# Allegro board MY_TEST731_2.brd
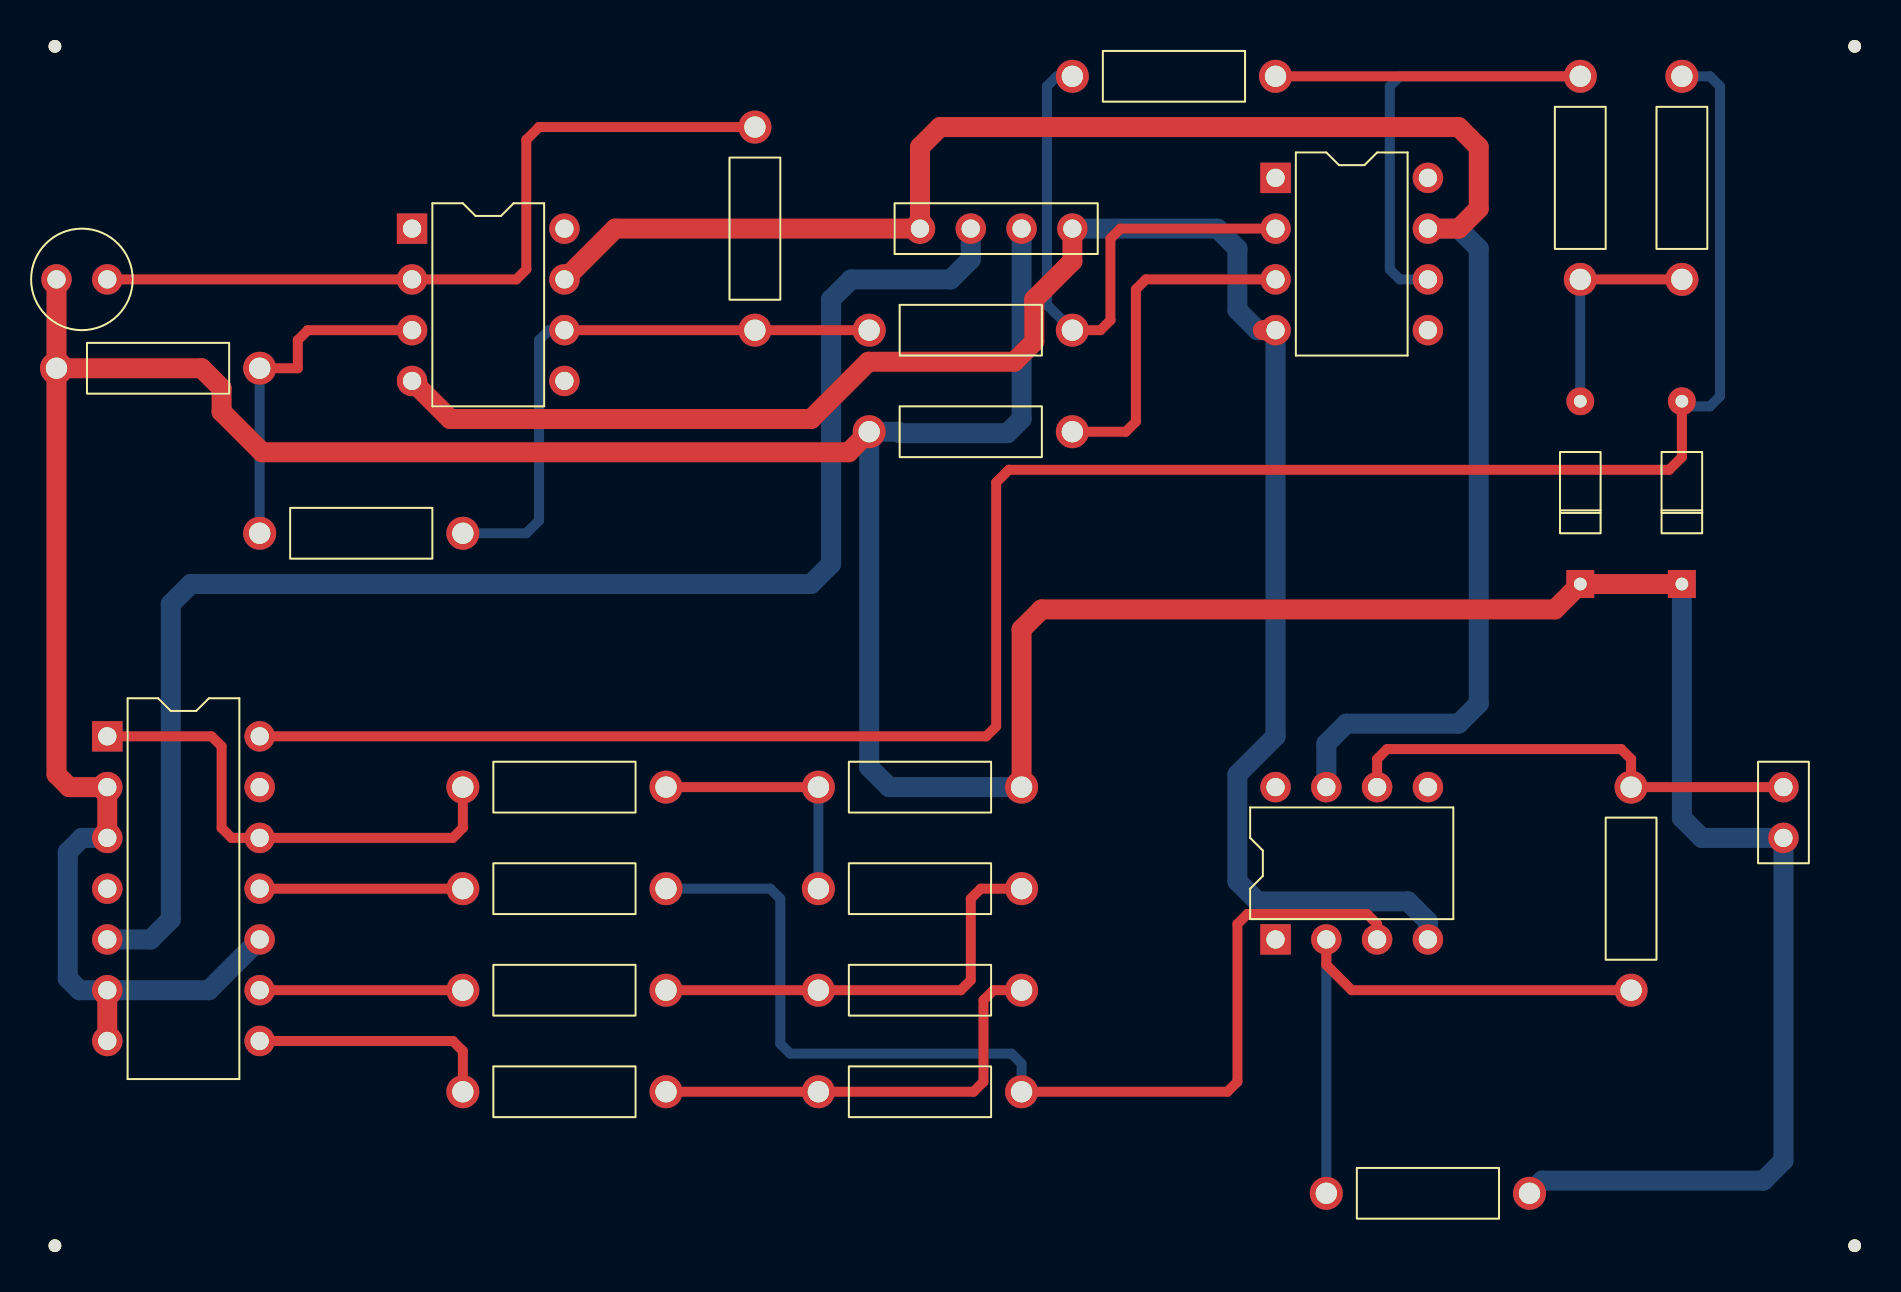
[diagram p0: board, top side]
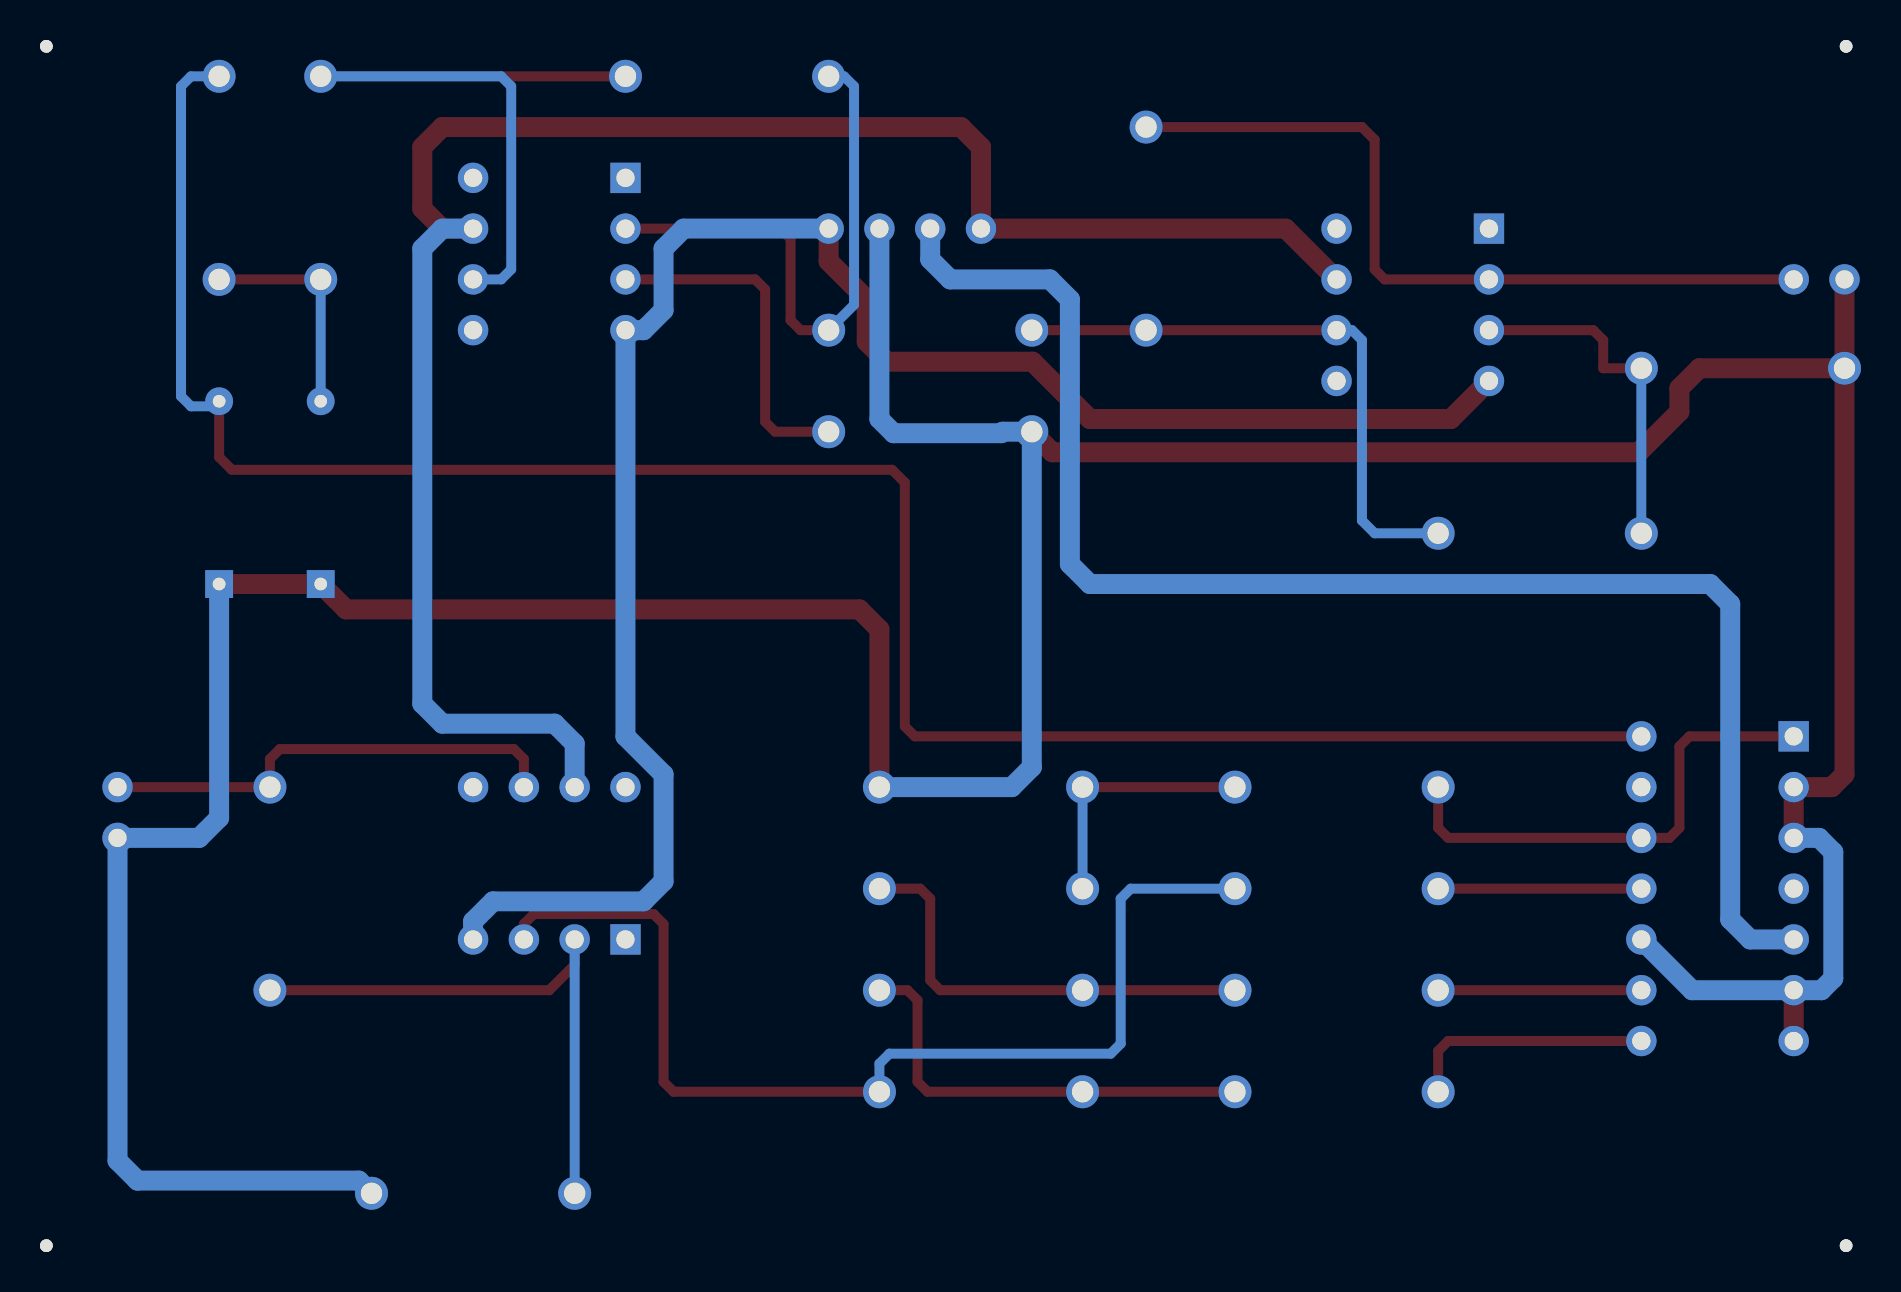
[diagram p1: board, bottom side, seen from below]

No outline. copper layers: TOP, BOTTOM. Coordinates in mm from the lowest, leftmost part position.

## Design rules (mm)
net group POWER: nets +5V +12V -12V GND
nets with their own width: min track width 0.5; nets CLK N00258 N00289 N00307 N00342 N00346 N00366 N00374 N01707 N01734 N01746 N01758 N01769 N01773 N01777 N01923 OUT SIG

## Placement (name value [footprint] x y rotation side)
C1  0.1uF  [CAP196]  0.08 48.34 270 top
D1  1N4148  [DO35]  76.28 33.1 0 top
D2  RD 5.8A  [DO35]  81.36 33.1 0 top
J1  CON2  [JUMPER2]  86.44 22.94 270 top
J2  CON4  [JUMPER4]  43.26 50.88 0 top
NOREF  -  [unnamed]  90 60 0 top
NOREF#2  -  [unnamed]  90 0 0 top
NOREF#3  -  [unnamed]  0 60 0 top
NOREF#4  -  [unnamed]  0 0 0 top
R1  10K  [RES400]  35.01 55.96 180 top
R2  5.1K  [RES400]  50.88 58.5 270 top
R3  10K  [RES400]  40.72 45.8 270 top
R4  1K  [RES400]  76.28 48.34 0 top
R5  1K  [RES400]  81.36 58.5 180 top
R6  10K  [RES400]  40.72 40.72 270 top
R7  6.8K  [RES400]  10.24 35.64 270 top
R8  1K  [RES400]  0.08 43.9 270 top
R9  22K  [RES400]  20.4 17.86 270 top
R10  22K  [RES400]  78.82 12.78 0 top
R11  10K  [RES400]  38.18 7.7 270 top
R12  22K  [RES400]  20.4 7.7 270 top
R13  10K  [RES400]  38.18 12.78 270 top
R14  22K  [RES400]  20.4 12.78 270 top
R15  10K  [RES400]  38.18 17.86 270 top
R16  R  [RES400]  73.74 2.62 90 top
R17  22K  [RES400]  20.4 22.94 270 top
R18  10K  [RES400]  48.34 22.94 90 top
U1  LM741  [DIP8_3]  17.86 50.88 0 top
U2  LM741  [DIP8_3]  61.04 53.42 0 top
U3  74LS90  [DIP14_3]  2.62 25.48 0 top
U4  LM741  [DIP8_3]  61.04 15.32 90 top

## Library data of the parts
C1 = C: Tolerance: ***; User Part Number: ***
D1 = D1N4148
D2 = D02BZ2_2
J1 = CON2: User Part Number: ***
J2 = CON4: User Part Number: ***
R1-R18 = R: Tolerance: ***; User Part Number: ***
U1 U2 U4 = LM741: Tolerance: ***; User Part Number: ***
U3 = 74LS90_1: Tolerance: ***; User Part Number: ***

## Footprints (pads in the part's own frame, mm; a bottom-side part is the same pattern mirrored in y, then rotated)
CAP196
  round 1.524 hole 0.914: 1(0,0) 2(0,2.54)
DIP8_3
  rect 1.524x1.524 hole 0.914: 1(0,0)
  round 1.524 hole 0.914: 2(0,-2.54) 3(0,-5.08) 4(0,-7.62) 5(7.62,-7.62) 6(7.62,-5.08) 7(7.62,-2.54) 8(7.62,0)
DIP14_3
  rect 1.524x1.524 hole 0.914: 1(0,0)
  round 1.524 hole 0.914: 2(0,-2.54) 3(0,-5.08) 4(0,-7.62) 5(0,-10.16) 6(0,-12.7) 7(0,-15.24) 8(7.62,-15.24) 9(7.62,-12.7) 10(7.62,-10.16) 11(7.62,-7.62) 12(7.62,-5.08) 13(7.62,-2.54) 14(7.62,0)
DO35
  rect 1.397x1.397 hole 0.635: 1(0,0)
  round 1.397 hole 0.635: 2(0,9.144)
JUMPER2
  round 1.524 hole 0.914: 1(0,0) 2(2.54,0)
JUMPER4
  round 1.524 hole 0.914: 1(0,0) 2(2.54,0) 3(5.08,0) 4(7.62,0)
RES400
  round 1.651 hole 1.067: 1(0,0) 2(0,10.16)
unnamed
  round 0.635 hole 3.175 unplated: (0,0)

## Nets
+5V: J2.2 U3.5
+12V: J2.1 U1.7 U2.7 U4.7
-12V: J2.4 U1.4(V-) U2.4(V-) U4.4(V-)
GND: C1.1 D1.1 D2.1 J1.2 J2.3 R6.1 R8.1 R16.1 R18.1 U3.2 U3.3 U3.6 U3.7(R92) U3.10
CLK: D2.2 R5.1 U3.14
OUT: J1.1 R10.2 U4.6
SIG: R9.2 R11.2 U4.3
N00258: C1.2 R1.1 U1.2
N00289: R7.1 R8.2 U1.3
N00307: R1.2 R3.1 R7.2 U1.6
N00342: R2.1 R3.2 U2.2
N00346: R6.2 U2.3
N00366: R2.2 R4.2 U2.6
N00374: D1.2 R4.1 R5.2
N01707: R17.1 U3.1 U3.12
N01734: R9.1 U3.11
N01746: R12.1 U3.8
N01758: R14.1 U3.9
N01769: R11.1 R12.2 R13.2
N01773: R13.1 R14.2 R15.2
N01777: R15.1 R17.2 R18.2
N01923: R10.1 R16.2 U4.2

Pads without a net: U1 1 5 8; U2 1 5 8; U3 4 13; U4 1 5 8

## Routing (per net, layer and track width the routed paths; a pad name or vN(x,y) marks a point on that pad's centre or on a via; arc(x,y) is an arc through that point)
+5V: length 75.8
  BOTTOM w1: U3.5 4.79,15.32 5.79,16.32 5.79,32.1 6.79,33.1 37.81,33.1 38.81,34.1 38.81,47.34 39.81,48.34 44.8,48.34 45.8,49.34 J2.2
+12V: length 94.1
  TOP w1: U2.7 70.2,50.88 71.2,51.88 71.2,54.96 70.2,55.96 44.26,55.96 43.26,54.96 J2.1 28.02,50.88 U1.7
  BOTTOM w1: U2.7 70.2,50.88 71.2,49.88 71.2,27.12 70.2,26.11 64.58,26.11 63.58,25.11 U4.7
-12V: length 94.3
  TOP w1: U2.4 60.41,45.8 ; J2.4 50.88,49.24 48.98,47.34 48.98,45.22 47.98,44.22 40.68,44.22 37.81,41.35 19.77,41.35 U1.4
  BOTTOM w1: U4.4 68.66,16.23 67.66,17.23 60.14,17.23 59.14,18.23 59.14,23.57 61.04,25.48 U2.4 60.14,45.8 59.14,46.8 59.14,49.88 58.13,50.88 J2.4
GND: length 226.5
  TOP w1: D2.1 D1.1 75.01,31.83 49.34,31.83 48.34,30.83 R18.1 ; R8.1 7.34,43.9 8.34,42.9 8.34,41.72 10.36,39.69 39.69,39.69 R6.1 ; R8.1 0.08,23.57 0.71,22.94 U3.2 U3.3 ; R8.1 C1.1 ; U3.6 U3.7
  BOTTOM w1: R18.1 41.72,22.94 40.72,23.94 R6.1 42.17,40.72 42.25,40.65 47.63,40.65 48.34,41.35 J2.3 ; U3.10 7.7,12.78 U3.6 1.23,12.78 0.64,13.37 0.64,19.69 1.35,20.4 U3.3 ; D2.1 81.36,21.4 82.36,20.4 J1.2 86.44,4.26 85.44,3.26 74.38,3.26 R16.1
CLK: length 106.7
  TOP w0.5: U3.14 46.57,25.48 47.07,25.98 47.07,38.18 47.7,38.81 80.72,38.81 81.36,39.45 D2.2
  BOTTOM w0.5: D2.2 81.61,41.99 82.77,41.99 83.27,42.49 83.27,58 82.77,58.5 R5.1
OUT: length 23.5
  TOP w0.5: J1.1 R10.2 78.82,24.34 78.32,24.84 66.62,24.84 66.12,24.34 U4.6
SIG: length 54.1
  TOP w0.5: R11.2 58.63,7.7 59.14,8.2 59.14,16.09 59.64,16.59 65.62,16.59 66.12,16.09 U4.3
  BOTTOM w0.5: R11.2 48.34,9.11 47.84,9.61 36.77,9.61 36.27,10.11 36.27,17.36 35.77,17.86 R9.2
N00258: length 39.3
  TOP w0.5: C1.2 U1.2 23.07,48.34 23.57,48.84 23.57,55.33 24.21,55.96 R1.1
N00289: length 17.5
  TOP w0.5: U1.3 12.64,45.8 12.14,45.3 12.14,43.9 R8.2
  BOTTOM w0.5: R8.2 R7.1
N00307: length 29.8
  TOP w0.5: U1.6 R1.2 R3.1
  BOTTOM w0.5: U1.6 24.71,45.8 24.21,45.3 24.21,36.27 23.57,35.64 R7.2
N00342: length 28.9
  TOP w0.5: U2.2 53.28,50.88 52.78,50.38 52.78,46.3 52.28,45.8 R3.2
  BOTTOM w0.5: R3.2 49.61,47.07 49.61,58 50.11,58.5 R2.1
N00346: length 17.2
  TOP w0.5: R6.2 53.55,40.72 54.05,41.22 54.05,47.84 54.55,48.34 U2.3
N00366: length 36.2
  TOP w0.5: R4.2 R2.2
  BOTTOM w0.5: R4.2 67.25,58.5 66.75,58 66.75,48.84 67.25,48.34 U2.6
N00374: length 11.2
  TOP w0.5: R4.1 R5.2
  BOTTOM w0.5: R4.1 D1.2
N01707: length 24.5
  TOP w0.5: R17.1 20.4,20.9 19.9,20.4 U3.12 8.84,20.4 8.34,20.9 8.34,24.98 7.84,25.48 U3.1
N01734: length 10.2
  TOP w0.5: U3.11 R9.1
N01746: length 12.4
  TOP w0.5: R12.1 20.4,9.74 19.9,10.24 U3.8
N01758: length 10.2
  TOP w0.5: U3.9 R14.1
N01769: length 22.3
  TOP w0.5: R13.2 46.94,12.78 46.44,12.28 46.44,8.2 45.94,7.7 R11.1 R12.2
N01773: length 22.3
  TOP w0.5: R14.2 R13.1 45.3,12.78 45.8,13.28 45.8,17.36 46.3,17.86 R15.2
N01777: length 12.7
  TOP w0.5: R17.2 R18.2
  BOTTOM w0.5: R18.2 R15.1
N01923: length 29.7
  TOP w0.5: U4.2 63.58,14.05 64.85,12.78 R10.1
  BOTTOM w0.5: U4.2 R16.2

## Text on the board
Board Geometry/Soldermask Top: ELECTRONIC CAB 20190731 | CHOPPING WAVE OSC
TOLERANCE_TOP: FIGURE | FINISHED_SIZE | 0.33 | 0.635 | 0.914 | 1.067 | 3.175 | DRILL CHART: TOP to BOTTOM | ALL UNITS ARE IN MILLIMETERS | PLATED | NON-PLATED | QTY | 12 | 4 | 46 | 36
